# Altium PCB PDC_Rev_2.PcbDoc (part 1 of 3)
Units mil, origin at the board's own origin, x right, y up, seen from the top; angles counter-clockwise.
Board outline 5005 x 4200 mil, 4 copper layers (Top Layer, Signal_1, Signal_2, Bottom Layer), stack 23.756 mil thick; 184 components, 175 nets, 851 pads, 1149 vias.
Unrouted connection lines stored in the file: 187.
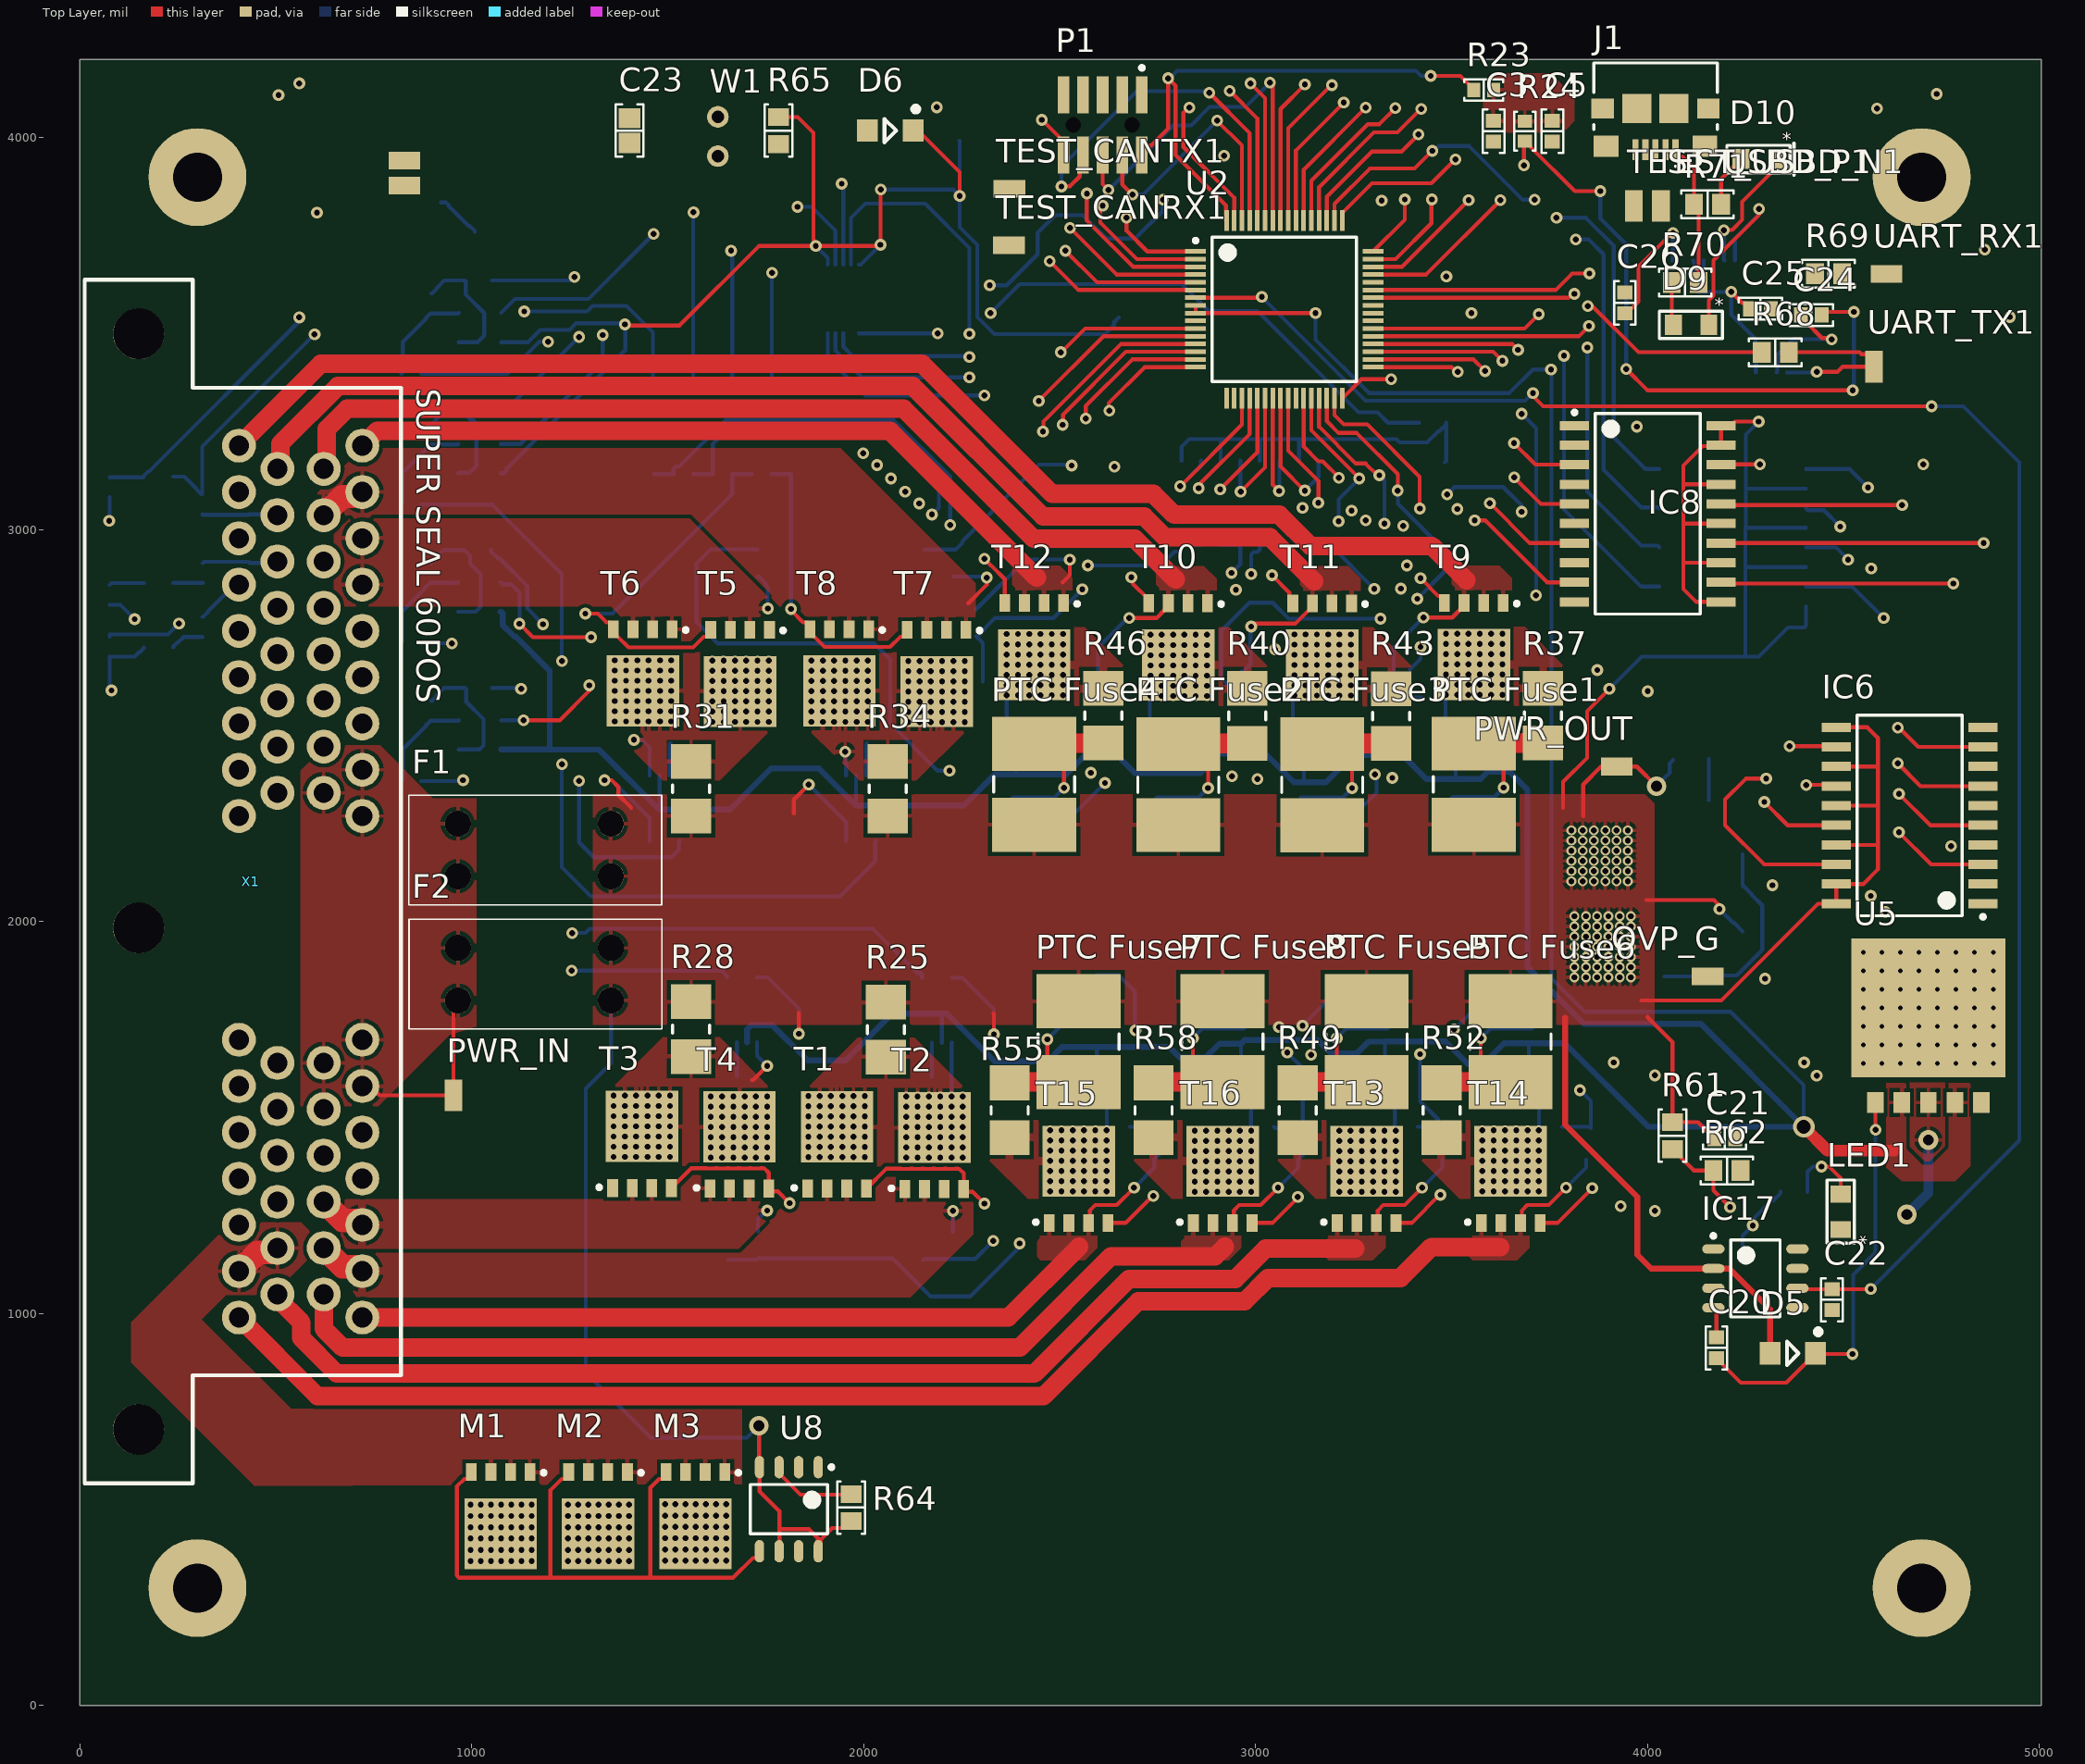
[diagram p0: Top Layer view]
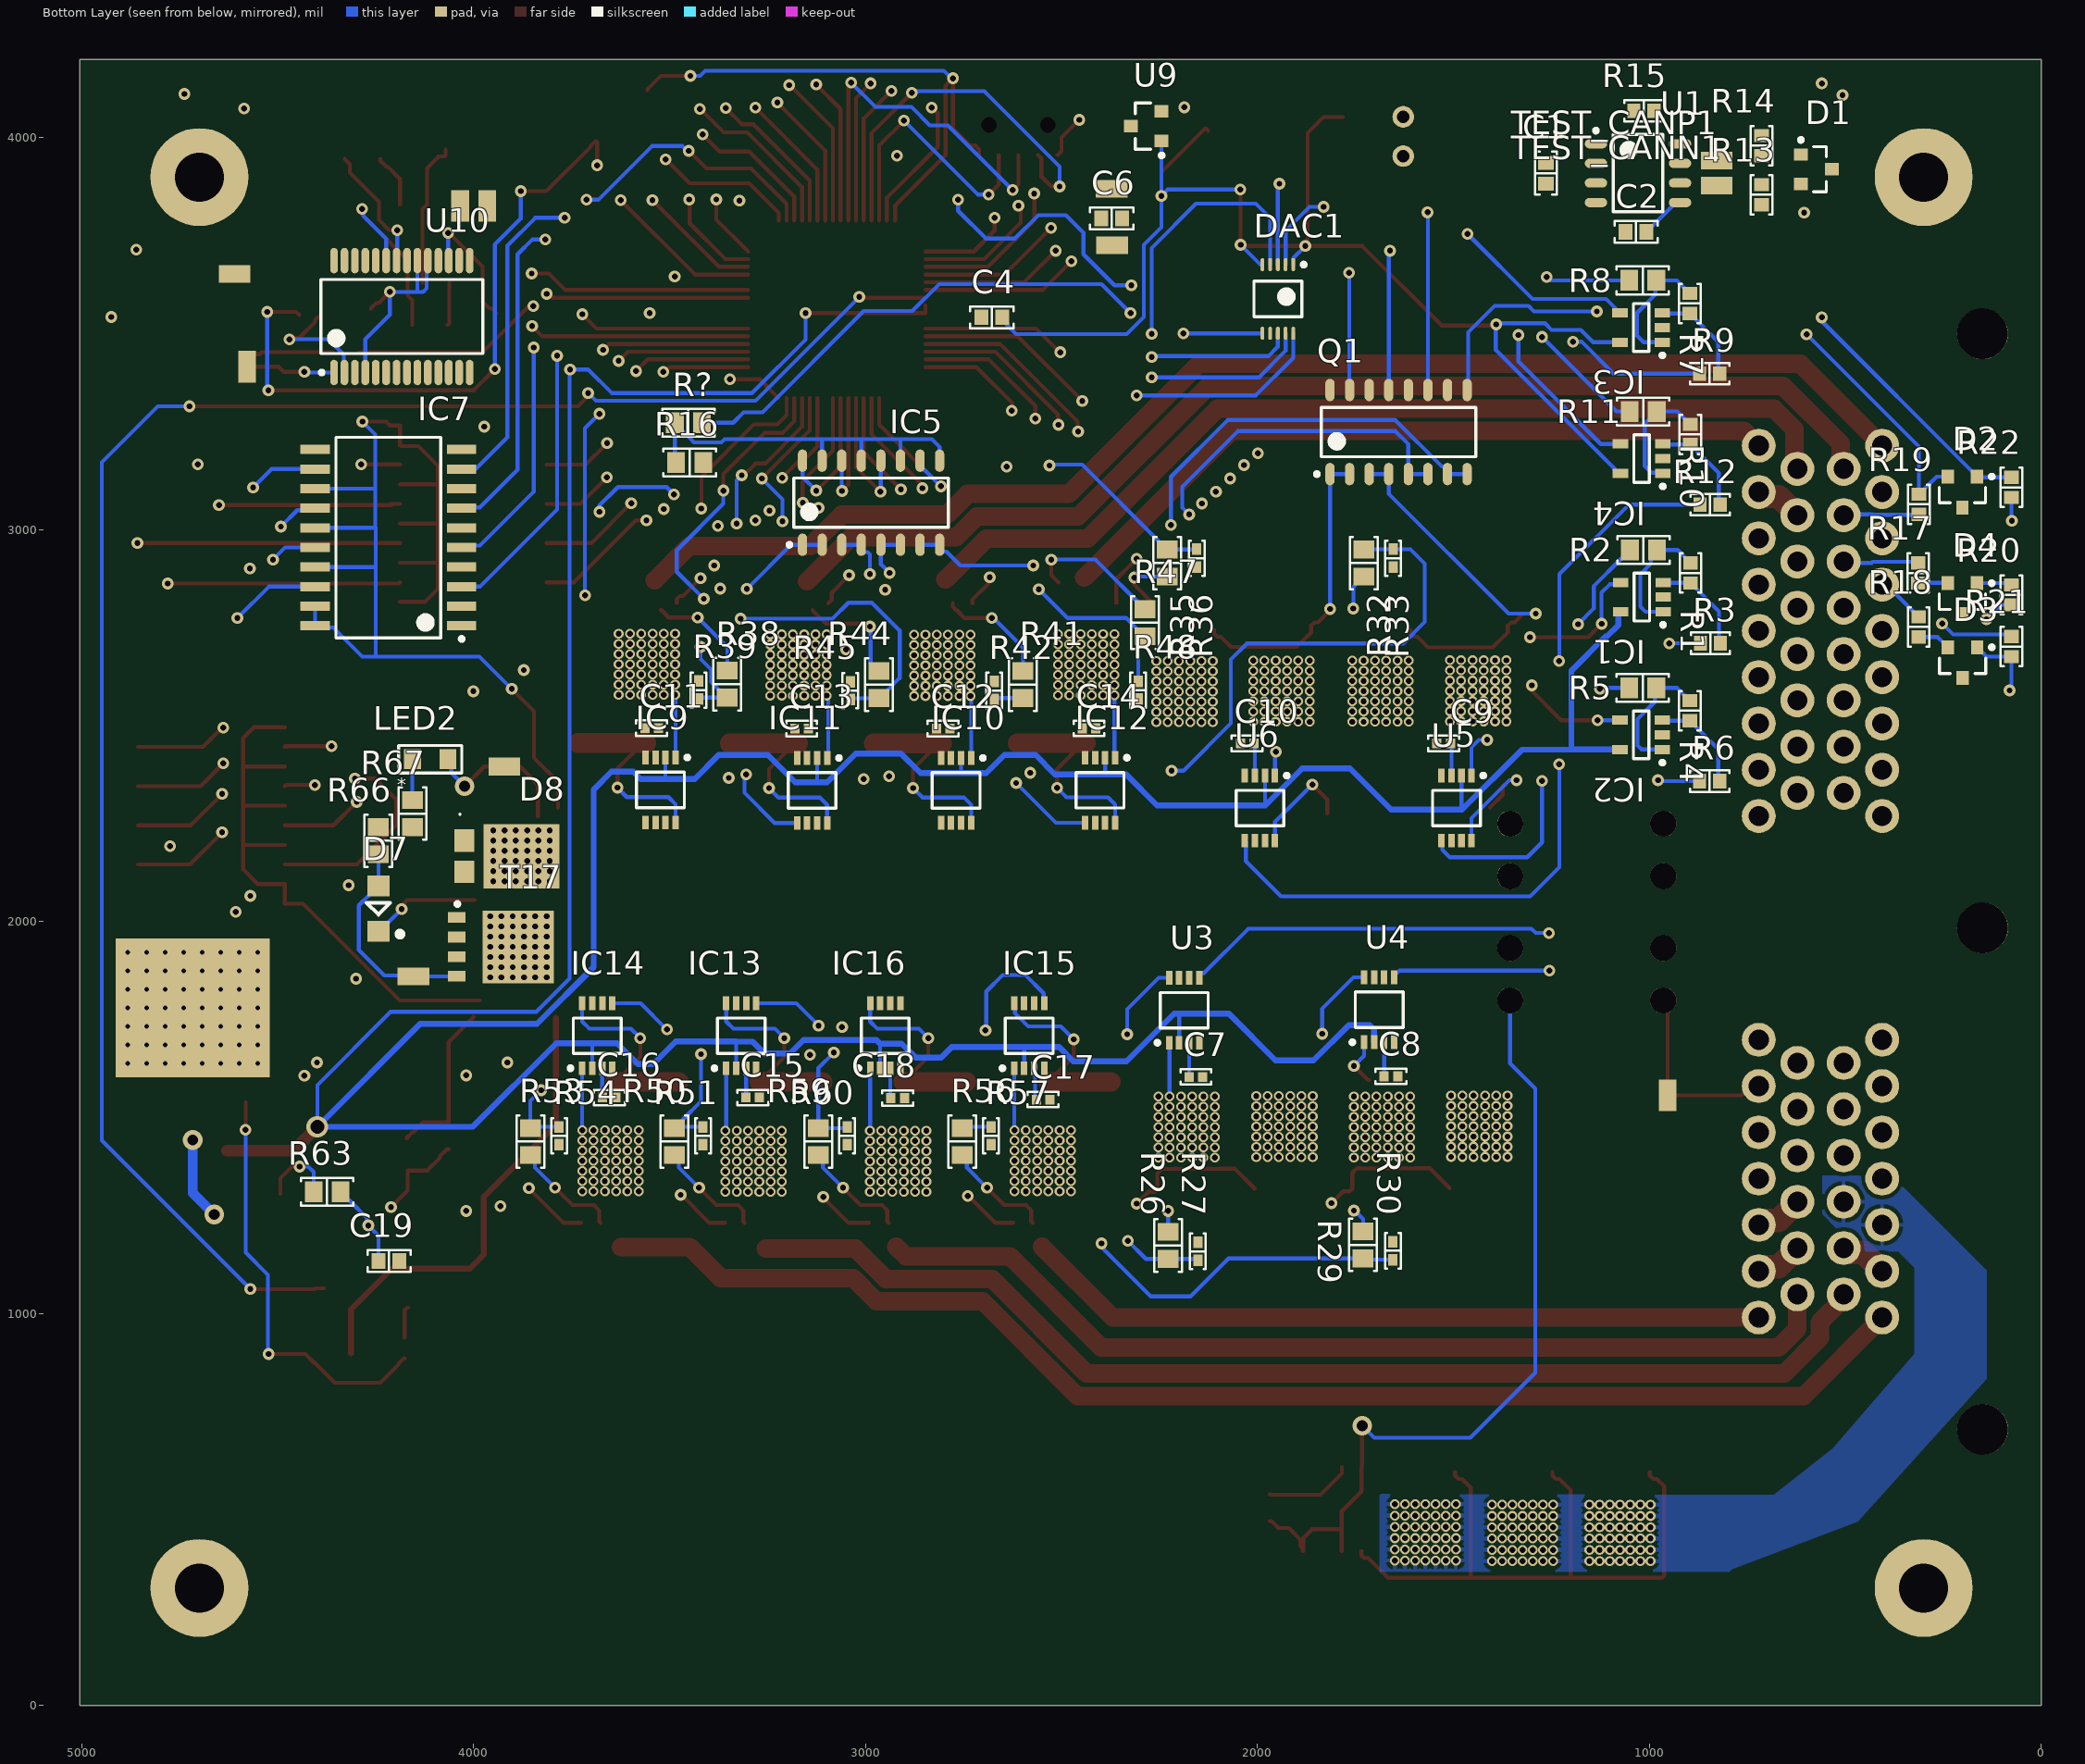
[diagram p1: Bottom Layer view, seen from below]
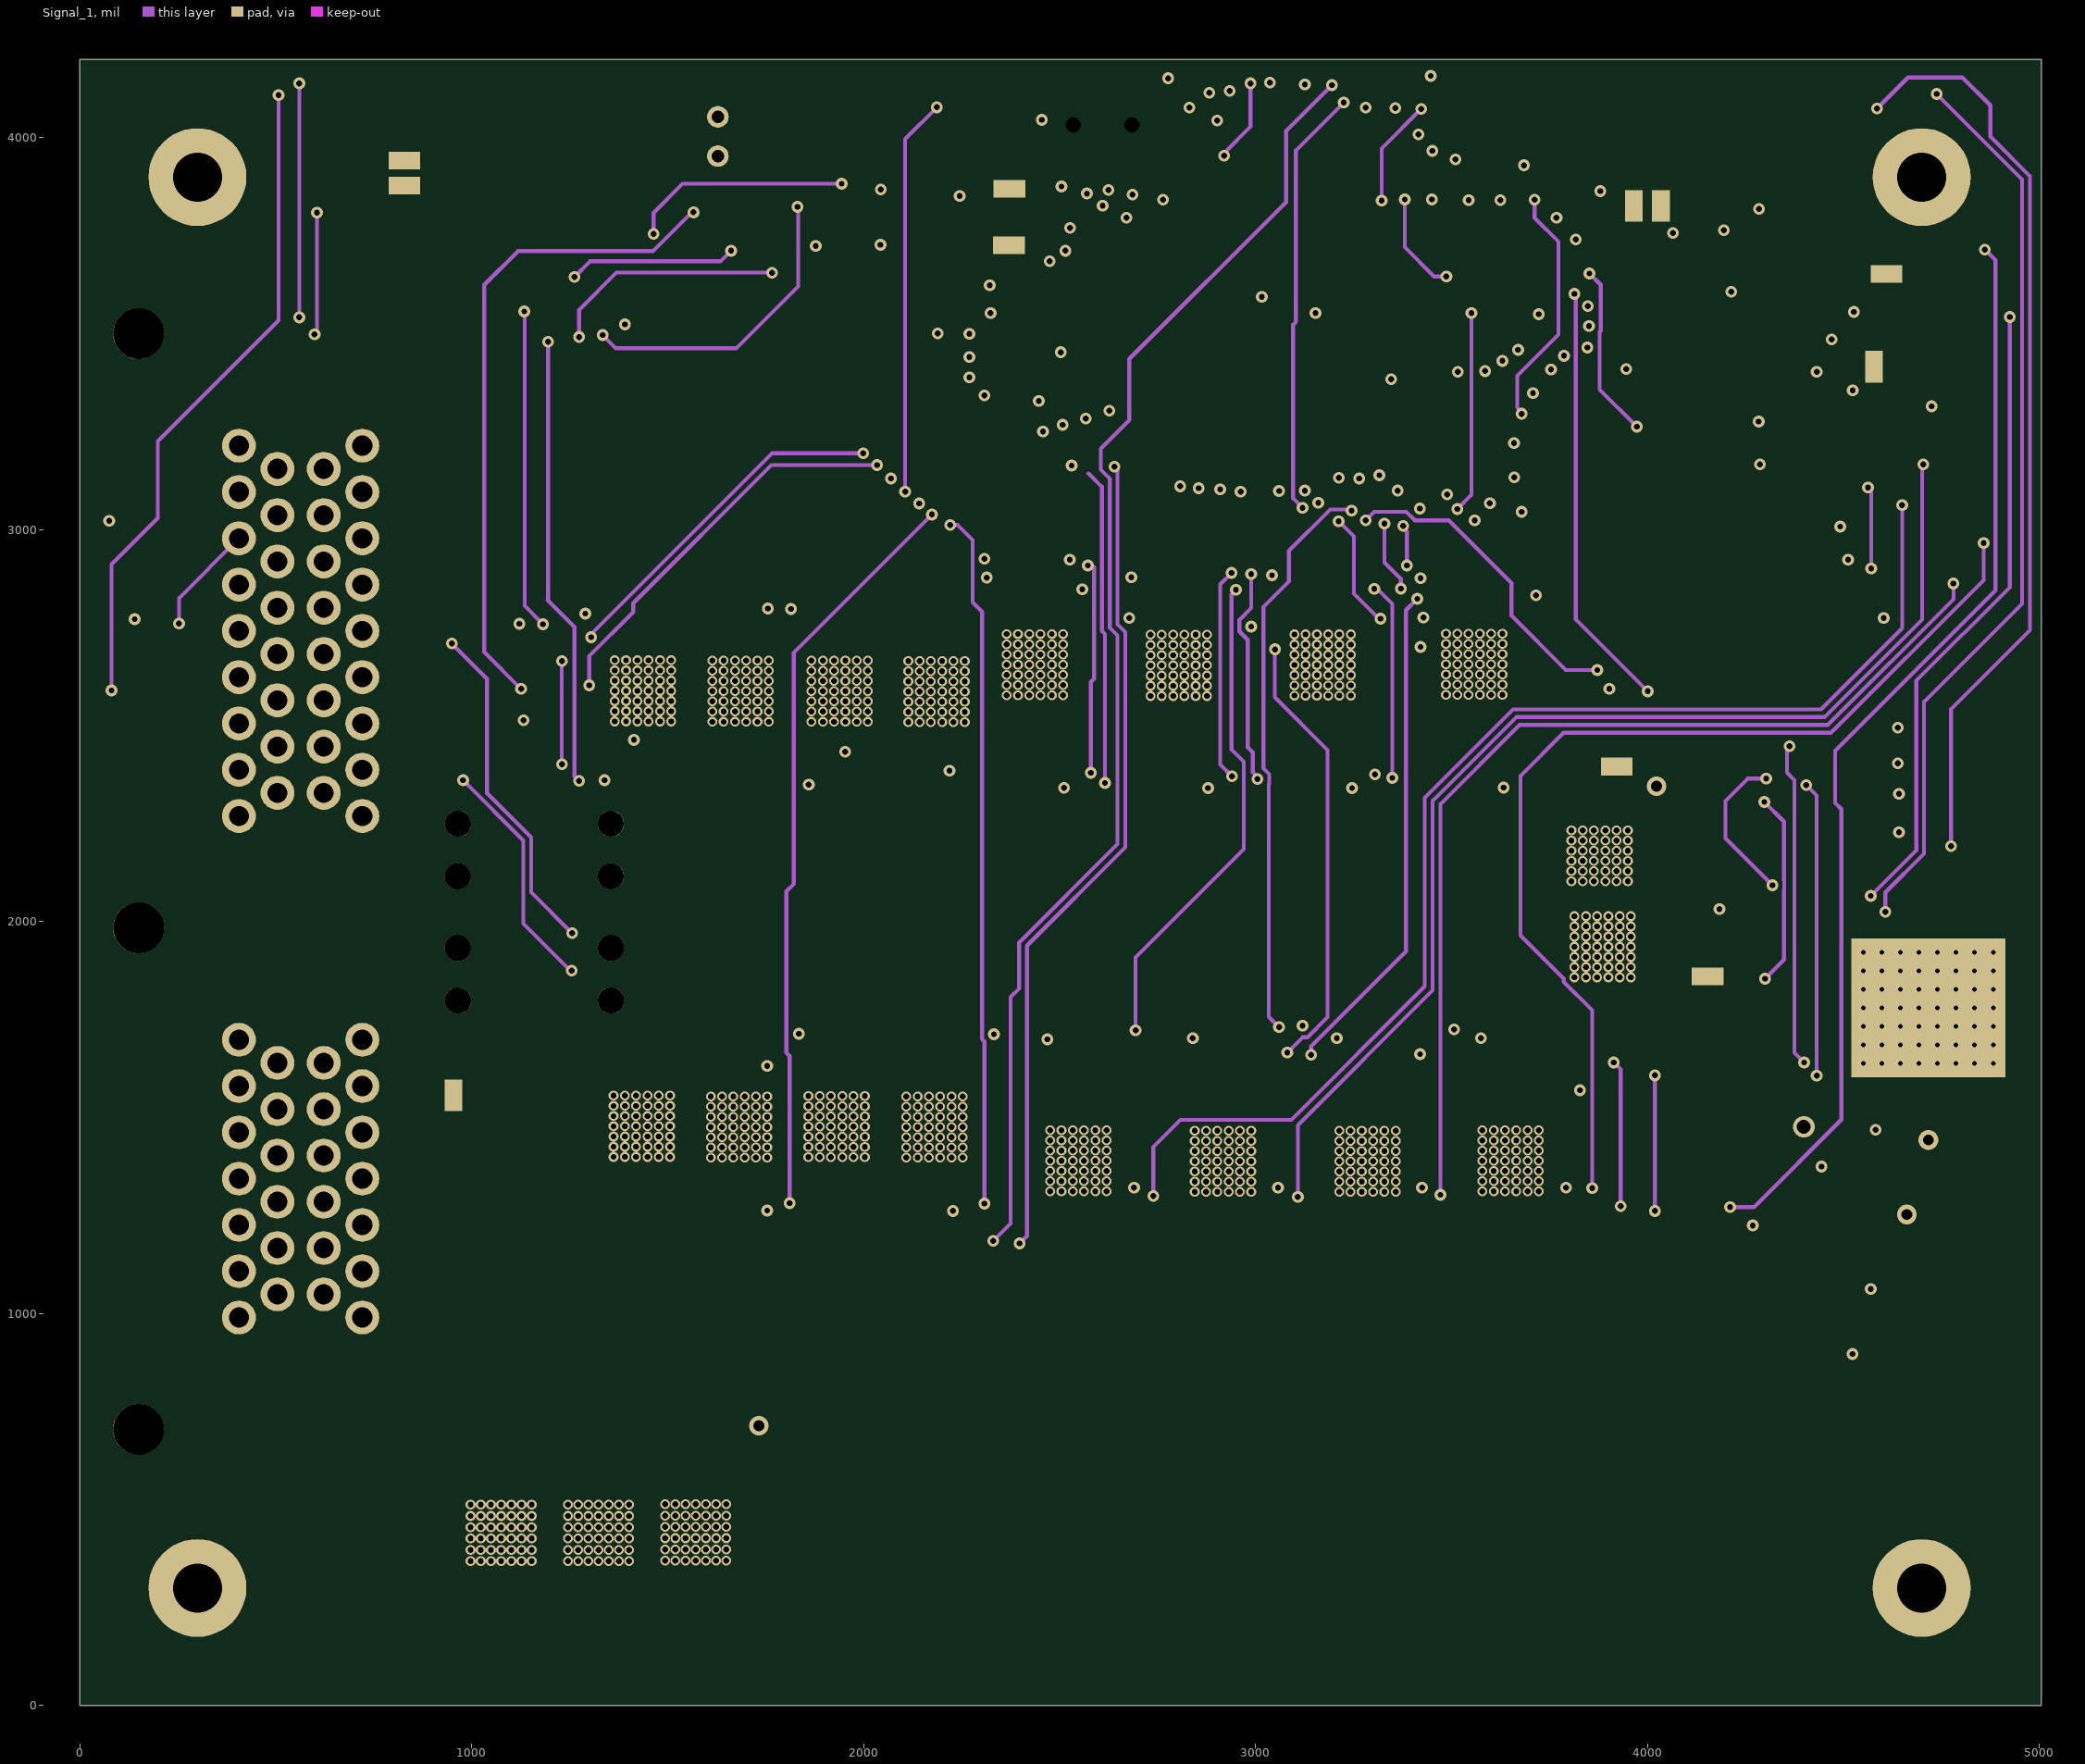
[diagram p2: Signal_1]
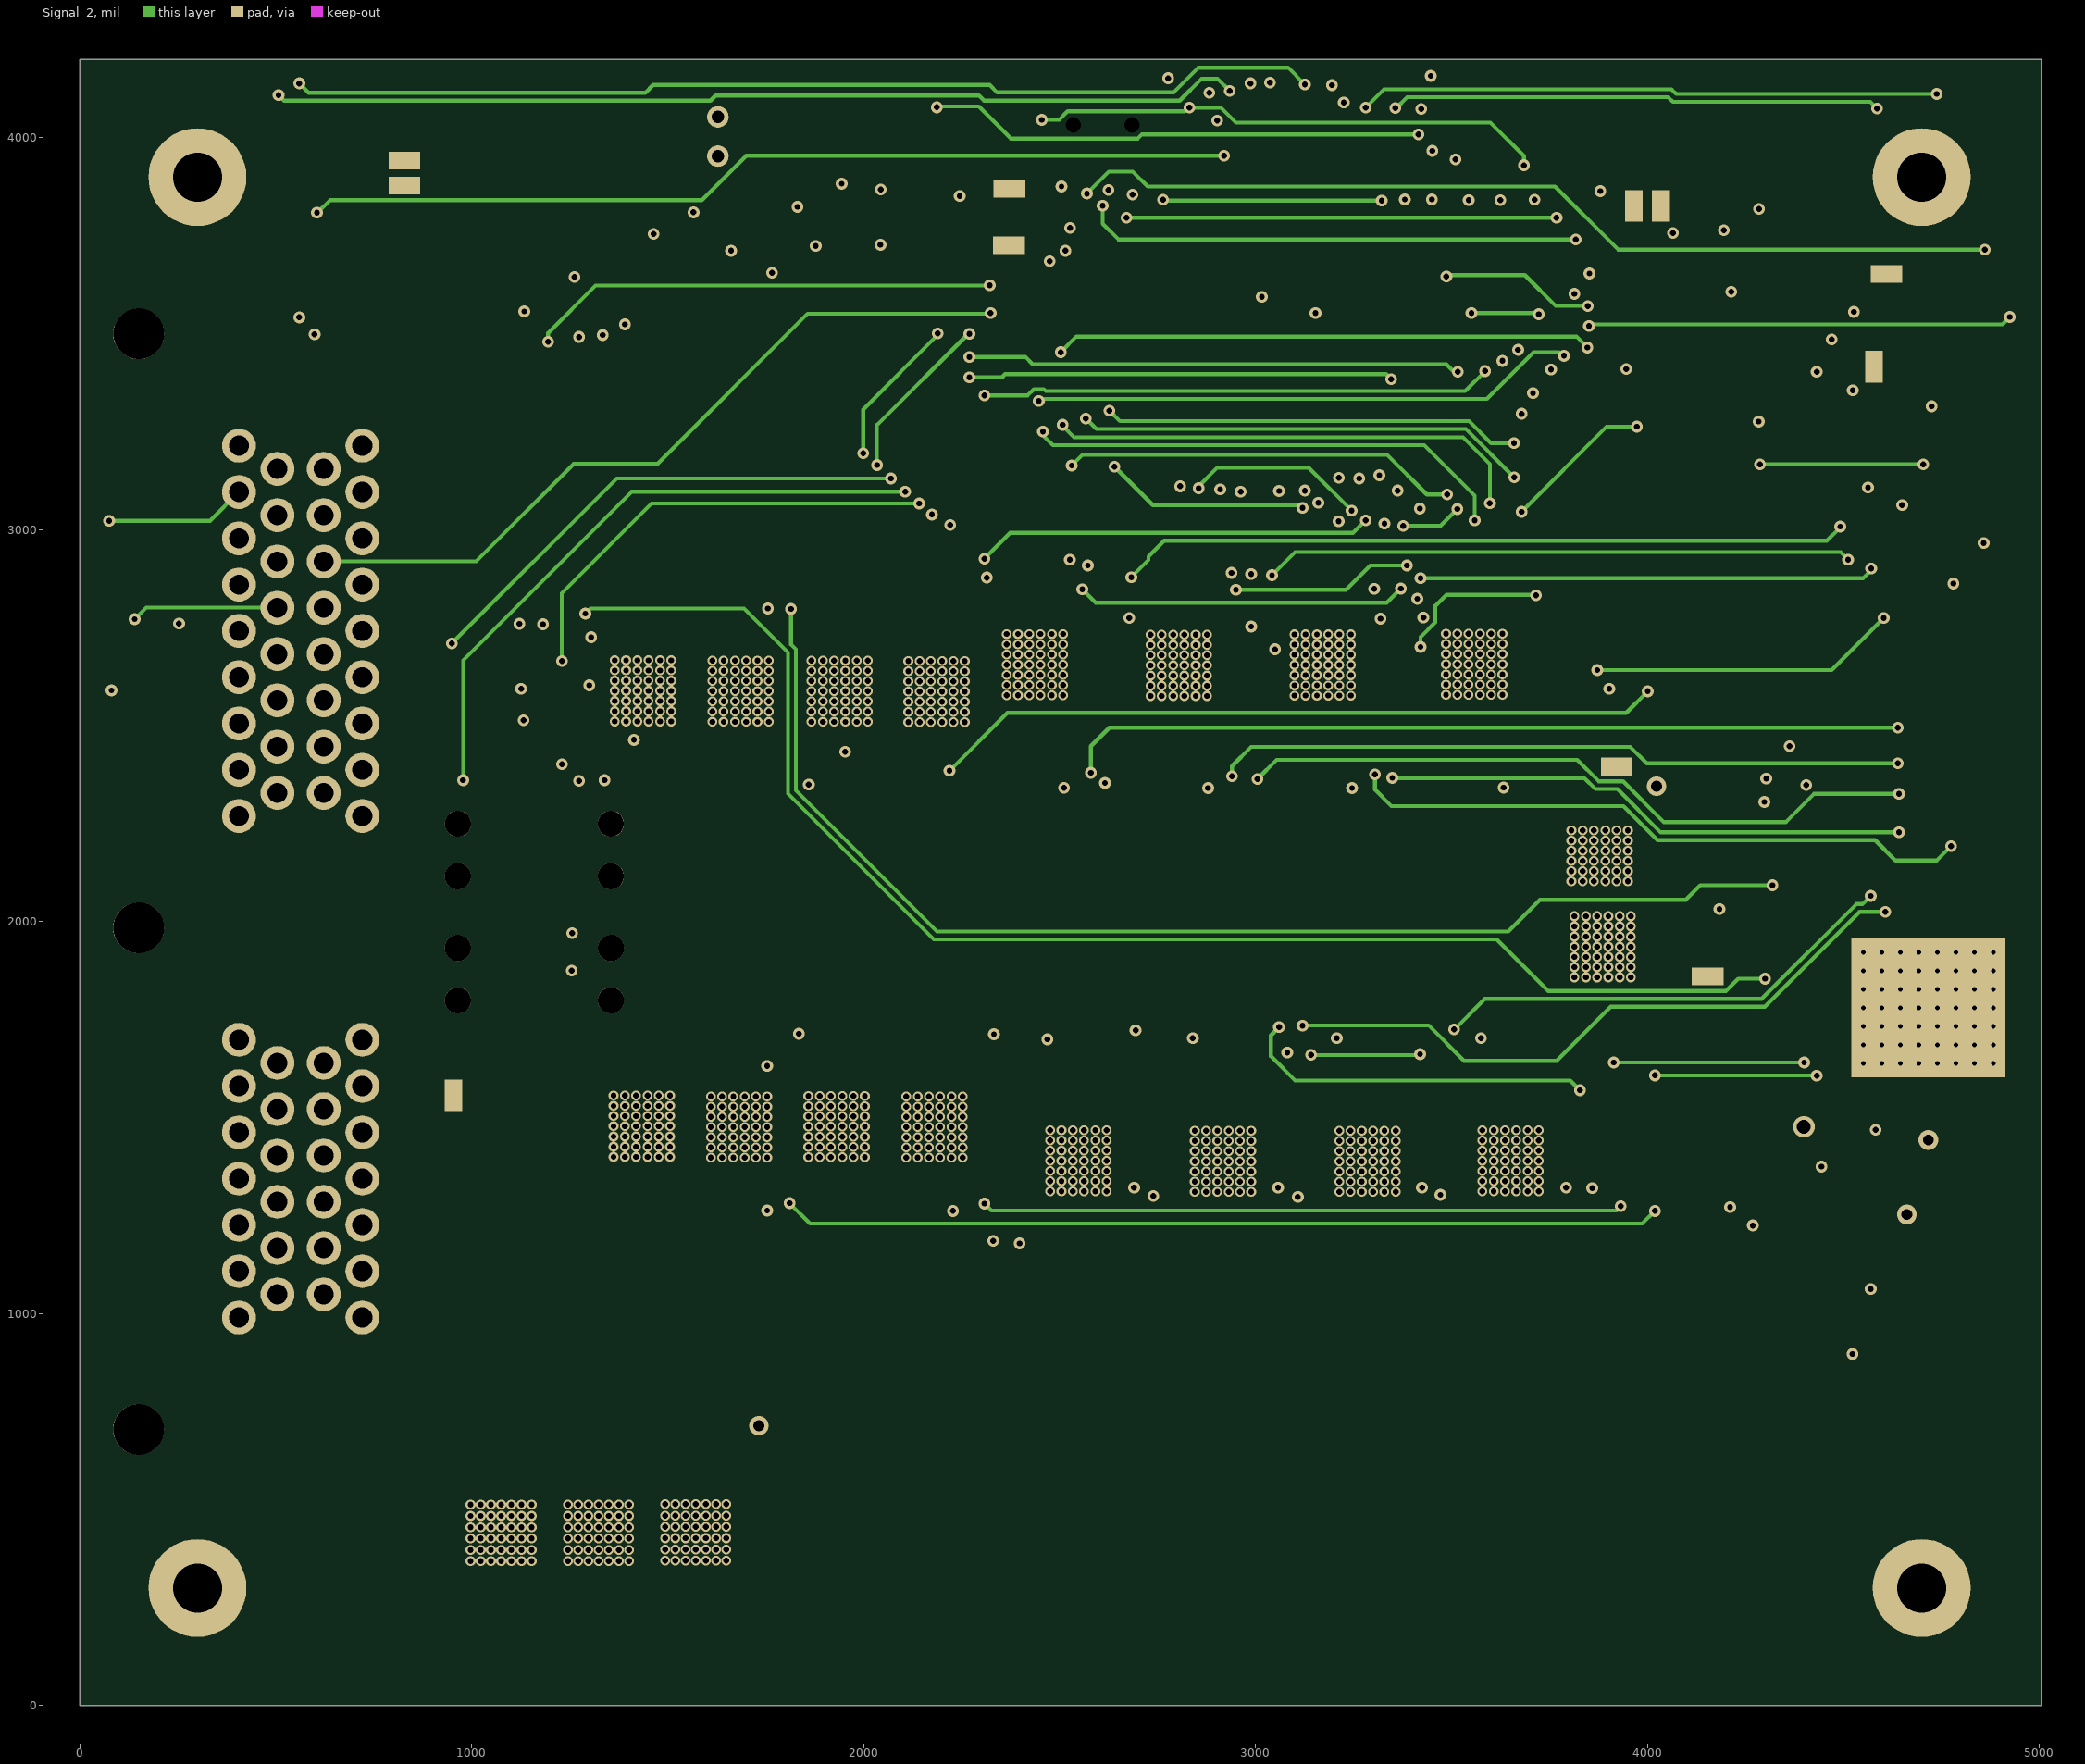
[diagram p3: Signal_2]

## Layer stack, top to bottom
Top Solder: solder mask 0.4, Solder Resist, Dk 3.5
Top Layer: signal copper 1.4
Dielectric 2: prepreg 2.8, PP-006, Dk 4.1
Signal_1: signal copper 1.3779
Dielectric 1: dielectric 12.6, FR-4, Dk 4.8
Signal_2: signal copper 1.3779
Dielectric 3: prepreg 2.8, PP-006, Dk 4.1
Bottom Layer: signal copper 1.4
Bottom Solder: solder mask 0.4, Solder Resist, Dk 3.5

## Board outline
0,0 5005,0 5005,4200 0,4200

## Design rules (kind name [scope] priority, off if disabled: settings)
Clearance Clearance_1 [All] p1: gap=10 ignorepadtopadclearanceinfootprint=FALSE except(0: Arc-Hole Track-Hole SMDPad-Hole THPad-Hole Via-Hole Fill-Hole Poly-Hole Region-Hole Text-Hole)
Clearance [All] p2: gap=10 ignorepadtopadclearanceinfootprint=FALSE except(0: Arc-Hole Track-Hole SMDPad-Hole THPad-Hole Via-Hole Fill-Hole Poly-Hole Region-Hole Text-Hole)
DiffPairsRouting [All] p1: maxlimit=10 minlimit=10 mostfreqgap=10 toplayer_minwidth=15 toplayer_maxwidth=15 toplayer_prefwidth=15 midlayer1_minwidth=15 midlayer1_maxwidth=15 midlayer1_prefwidth=15 midlayer2_minwidth=15 midlayer2_maxwidth=15 midlayer2_prefwidth=15 bottomlayer_minwidth=15 bottomlayer_maxwidth=15 bottomlayer_prefwidth=15 maxuncoupledlength=500
MatchedLengths "Schematic Matched Net Lengths" [InNet('D_N')] p1: tolerance=10 checknetsindiffpair=FALSE checkdiffpairvsdiffpair=TRUE checkxsignals=TRUE checkothers=TRUE
PolygonConnect [All] p1: connectstyle=Relief reliefconductorwidth=10 reliefentries=4 polygonreliefangle="90 Angle" airgapwidth=10
RoutingVias [All] p1: holewidth=15 width=30 viastyle="Through Hole" minholewidth=15 minwidth=30 maxholewidth=28 maxwidth=50
SolderMaskExpansion [All] p1: expansion=4
Width [All] p1: maxlimit=10 minlimit=10 preferedwidth=10
29 further rules are at their usual default settings.

## Classes and differential pairs
channel class PDC_Low_Current_Outputs: U_PDC_Low_Current_Outputs1 U_PDC_Low_Current_Outputs2 U_PDC_Low_Current_Outputs3 U_PDC_Low_Current_Outputs4 U_PDC_Low_Current_Outputs5 U_PDC_Low_Current_Outputs6 U_PDC_Low_Current_Outputs7 U_PDC_Low_Current_Outputs8
channel class PDC_high_Current_Outputs: U_PDC_high_Current_Outputs1 U_PDC_high_Current_Outputs2 U_PDC_high_Current_Outputs3 U_PDC_high_Current_Outputs4
channel class PDC_Gate_Driver: U_PDC_Gate_Driver1 U_PDC_Gate_Driver2
channel class Analog_HC_Overcurrent_Redundancy: U_Analog_HC_Overcurrent_Redundancy1 U_Analog_HC_Overcurrent_Redundancy2 U_Analog_HC_Overcurrent_Redundancy3 U_Analog_HC_Overcurrent_Redundancy4
component class U_USB: C24 C25 C26 D9 D10 J1 R68 R69 R70 R71 TEST_USBD_N1 TEST_USBD_P1 U10 UART_RX1 UART_TX1
component class U_Temperature_Sensing: U9
component class U_Superseal: X1
component class U_RVP_OVP_HC: D7 D8 LED2 OVP_G PWR_IN PWR_OUT R66 R67 T17
component class U_Reset_Pin: C23 D6 R65 W1
component class U_Rectifier_shutdown_LT1910: R64 U8
component class U_Rectifier_shutdown_Gate: M1 M2 M3
component class U_Power_supply: C19 C20 C21 C22 D5 IC17 LED1 R61 R62 R63 U5
component class U_PDC_Low_Current_Outputs8: C18 IC16 "PTC Fuse8" R58 R59 R60 T16
component class U_PDC_Low_Current_Outputs7: C17 IC15 "PTC Fuse7" R55 R56 R57 T15
component class U_PDC_Low_Current_Outputs6: C16 IC14 "PTC Fuse6" R52 R53 R54 T14
component class U_PDC_Low_Current_Outputs5: C15 IC13 "PTC Fuse5" R49 R50 R51 T13
component class U_PDC_Low_Current_Outputs4: C14 IC12 "PTC Fuse4" R46 R47 R48 T12
component class U_PDC_Low_Current_Outputs3: C13 IC11 "PTC Fuse3" R43 R44 R45 T11
component class U_PDC_Low_Current_Outputs2: C12 IC10 "PTC Fuse2" R40 R41 R42 T10
component class U_PDC_Low_Current_Outputs1: C11 IC9 "PTC Fuse1" R37 R38 R39 T9
component class U_PDC_high_Current_Outputs4: C10 R34 R35 R36 T7 T8 U6
component class U_PDC_high_Current_Outputs3: C9 R31 R32 R33 T5 T6 U5
component class U_PDC_high_Current_Outputs2: C8 R28 R29 R30 T3 T4 U4
component class U_PDC_high_Current_Outputs1: C7 R25 R26 R27 T1 T2 U3
component class U_PDC_Gate_Driver1: IC7
component class U_MCU_MKE185F512VLH16: C3 C4 C5 C6 P1 R23 R24 TEST_CANRX1 TEST_CANTX1 U2
component class U_Input_Current_Limiting: D2 D3 D4 R17 R18 R19 R20 R21 R22
component class U_Gate_driver: IC6
component class U_E_stop: IC5 R16 R?
component class U_CAN_Tranceiver: C1 C2 D1 R13 R14 R15 TEST_CANN1 TEST_CANP1 U1
component class U_Analog_HC_Overcurrent_Redundancy4: IC4 R10 R11 R12
component class U_Analog_HC_Overcurrent_Redundancy3: IC3 R7 R8 R9
component class U_Analog_HC_Overcurrent_Redundancy2: IC2 R4 R5 R6
component class U_Analog_HC_Overcurrent_Redundancy1: IC1 R1 R2 R3
component class U_Analog_HC_Overcurrent_MMPQ3904: DAC1 Q1
component class PDC: F1 F2
differential pair D: +D_P -D_N
differential pair CAN: +CAN_P -CAN_N

## Components (designator, comment, footprint, x,y, rotation, side; value= is the part's Value field where it differs from the comment)
C1 "Capacitor MLCC 0.10uf 50V CAP 0603/1608" "CAP 0603/1608" 1264,3910 r270 bottom value=0.10uf (schematic designator C11)
C2 "Capacitor MLCC 4700pf 50V CAP 0603/1608" "CAP 0603/1608" 1034,3760.23 r180 bottom value=4700pf (schematic designator C12)
C3 "Capacitor MLCC 0.10uf 16V CAP 0603/1608" "CAP 0603/1608" 3607.36,4016.98 r90 top value=0.10uf (schematic designator C6)
C4 "Capacitor MLCC 0.10uf 25V CAP 0603/1608" "CAP 0603/1608" 2678,3542 r180 bottom value=0.10uf (schematic designator C24)
C5 "Capacitor MLCC 100pf 25V CAP 0603/1608" "CAP 0603/1608" 3757.36,4016.98 r90 top value=100pf (schematic designator C23)
C6 "Capacitor MLCC 0.10uf 25V CAP 0603/1608" "CAP 0603/1608" 2371.98,3794.64 r0 bottom value=0.10uf (schematic designator C5)
C7 "Capacitor MLCC 220pf 16V CAP 0402/1005" "CAP 0402/1005" 2157,1604 r0 bottom value=220pf (schematic designator C1)
C8 "Capacitor MLCC 220pf 16V CAP 0402/1005" "CAP 0402/1005" 1659.52,1605.3 r0 bottom value=220pf (schematic designator C1)
C9 "Capacitor MLCC 220pf 16V CAP 0402/1005" "CAP 0402/1005" 1525,2455 r180 bottom value=220pf (schematic designator C1)
C10 "Capacitor MLCC 220pf 16V CAP 0402/1005" "CAP 0402/1005" 2026.44,2455 r180 bottom value=220pf (schematic designator C1)
C11 "Capacitor MLCC 220pf 16V CAP 0402/1005" "CAP 0402/1005" 3546,2493.75 r180 bottom value=220pf (schematic designator C2)
C12 "Capacitor MLCC 220pf 16V CAP 0402/1005" "CAP 0402/1005" 2802,2492.65 r180 bottom value=220pf (schematic designator C2)
C13 "Capacitor MLCC 220pf 16V CAP 0402/1005" "CAP 0402/1005" 3163,2492.54 r180 bottom value=220pf (schematic designator C2)
C14 "Capacitor MLCC 220pf 16V CAP 0402/1005" "CAP 0402/1005" 2430,2493.12 r180 bottom value=220pf (schematic designator C2)
C15 "Capacitor MLCC 220pf 16V CAP 0402/1005" "CAP 0402/1005" 3288,1551.35 r0 bottom value=220pf (schematic designator C2)
C16 "Capacitor MLCC 220pf 16V CAP 0402/1005" "CAP 0402/1005" 3654,1551.35 r0 bottom value=220pf (schematic designator C2)
C17 "Capacitor MLCC 220pf 16V CAP 0402/1005" "CAP 0402/1005" 2547,1546 r0 bottom value=220pf (schematic designator C2)
C18 "Capacitor MLCC 220pf 16V CAP 0402/1005" "CAP 0402/1005" 2918,1550 r0 bottom value=220pf (schematic designator C2)
C19 "Capacitor MLCC 10uf 16V CAP 0603/1608" "CAP 0603/1608" 4216,1134.36 r0 bottom value=10uf (schematic designator C3)
C20 "Capacitor MLCC 10uf 16V CAP 0603/1608" "CAP 0603/1608" 4176,912.57 r270 top value=10uf (schematic designator C4)
C21 "Capacitor MLCC 2.2uf 16V CAP 0603/1608" "CAP 0603/1608" 4197,1447 r180 top value=2.2uf (schematic designator C5)
C22 "Capacitor MLCC 2.2uf 16V CAP 0603/1608" "CAP 0603/1608" 4471,1035.46 r90 top value=2.2uf (schematic designator C6)
C23 "Capacitor MLCC 4700pf 25V CAP 0805/2012" "CAP 0805/2012" 1403,4018.45 r90 top value=4700pf (schematic designator C13)
C24 "Capacitor MLCC 0.10uf 25V CAP 0603/1608" "CAP 0603/1608" 4418.43,3548 r0 top value=0.10uf (schematic designator C17)
C25 "Capacitor MLCC 0.10uf 25V CAP 0603/1608" "CAP 0603/1608" 4288.43,3564 r180 top value=0.10uf (schematic designator C18)
C26 "Capacitor MLCC 0.10uf 25V CAP 0603/1608" "CAP 0603/1608" 3942.43,3579 r270 top value=0.10uf (schematic designator C19)
D1 "NUP1105LT1G" "SOT-23 (TO-236)" 574,3920 r180 bottom value=TVS_24V (schematic designator D3)
D2 "AZ23C4V7-7-F Dual Zenner Diodes" SOT23-3 201.17,3096.41 r270 bottom value=4.7V (schematic designator D3)
D3 "AZ23C4V7-7-F Dual Zenner Diodes" SOT23-3 201,2660.82 r270 bottom value=4.7V (schematic designator D4)
D4 "AZ23C4V7-7-F Dual Zenner Diodes" SOT23-3 201.17,2824.37 r270 bottom value=4.7V (schematic designator D5)
D5 "DIODE" SOD123F 4371,898.6 r0 top value=1A (schematic designator D1)
D6 "DIODE" SOD123F 2068,4018.45 r0 top
D7 "DDZ9701-7" SOD123F 4243.18,2033.33 r270 bottom value=14Vz
D8 "DIODE_2A1K" TO-277 3914,2167 r180 bottom value="20 A"
D9 "" 0805_LED 4111.43,3523 r0 top value=Green (schematic designator D4)
D10 "" 0805_LED 4283.95,3946 r0 top value=Red (schematic designator D5)
DAC1 "LED" "MSOP10 (RM-10)" 1948,3589 r270 bottom value=10bit
F1 "Fuse" 3568-MiniFuseHolder 1159.72,2183.07 r180 top
F2 "Fuse" 3568-MiniFuseHolder 1160,1866.09 r180 top
IC1 "Op-Amp LT1716" SOT23-5 1019.13,2828.4 r0 bottom
IC2 "Op-Amp LT1716" SOT23-5 1021,2476.6 r0 bottom (schematic designator IC1)
IC3 "Op-Amp LT1716" SOT23-5 1021,3516 r0 bottom (schematic designator IC1)
IC4 "Op-Amp LT1716" SOT23-5 1019.87,3181.6 r0 bottom (schematic designator IC1)
IC5 "MMPQ3906 PNP General Purpose Amp" SOIC-16-NB 2986,3069 r90 bottom (schematic designator IC2)
IC6 "LT1161ISWPBF MOSFET Driver" SO-20 4669,2271 r180 top (schematic designator IC3)
IC7 "LT1161ISWPBF MOSFET Driver" SO-20 4217.57,2980 r0 bottom (schematic designator IC4)
IC8 "LT1161ISWPBF MOSFET Driver" SO-20 4001,3041 r0 top (schematic designator IC4)
IC9 "LT6100HMS8PBF Current Sense Amp" MSOP-8 3523.39,2336.11 r270 bottom (schematic designator IC5)
IC10 "LT6100HMS8PBF Current Sense Amp" MSOP-8 2769,2335 r270 bottom (schematic designator IC5)
IC11 "LT6100HMS8PBF Current Sense Amp" MSOP-8 3136.42,2334.89 r270 bottom (schematic designator IC5)
IC12 "LT6100HMS8PBF Current Sense Amp" MSOP-8 2401.58,2335.47 r270 bottom (schematic designator IC5)
IC13 "LT6100HMS8PBF Current Sense Amp" MSOP-8 3317.33,1709 r90 bottom (schematic designator IC5)
IC14 "LT6100HMS8PBF Current Sense Amp" MSOP-8 3684.76,1709 r90 bottom (schematic designator IC5)
IC15 "LT6100HMS8PBF Current Sense Amp" MSOP-8 2582.49,1709 r90 bottom (schematic designator IC5)
IC16 "LT6100HMS8PBF Current Sense Amp" MSOP-8 2949.91,1709 r90 bottom (schematic designator IC5)
IC17 "MAX6350CSA+ 5V" SOIC-8 4275.45,1089.91 r0 top value=5V (schematic designator IC6)
J1 "1981568-1" TECO-1981568-5_V 4020.67,3969.69 r180 top value=CONN
LED1 "LED" 0805_LED 4493,1260 r270 top value=Green
LED2 "LED" 0805_LED 4111.18,2414.69 r0 bottom value=Green
M1 "PSMN2R2-25YLC 25V Logic Level MOSFET" LFPAK-SO8 1074,489.7 r270 top value=N_Channel
M2 "PSMN2R2-25YLC 25V Logic Level MOSFET" LFPAK-SO8 1322.4,489.7 r270 top value=N_Channel
M3 "PSMN2R2-25YLC 25V Logic Level MOSFET" LFPAK-SO8 1570.79,489.7 r270 top value=N_Channel
OVP_G "RCU-0C" RCU-0C 4153.62,1860.73 r90 top
P1 "5103309-1" HDR2X5_SMT 2610,4033 r180 top value=CONN
"PTC Fuse1" "PTC Fuse" "PTC Fuse 2920/07351" 3557.27,2350.87 r270 top
"PTC Fuse2" "PTC Fuse" "PTC Fuse 2920/07351" 2802.89,2349.76 r270 top (schematic designator "PTC Fuse1")
"PTC Fuse3" "PTC Fuse" "PTC Fuse 2920/07351" 3170.31,2349.66 r270 top (schematic designator "PTC Fuse1")
"PTC Fuse4" "PTC Fuse" "PTC Fuse 2920/07351" 2435.47,2350.23 r270 top (schematic designator "PTC Fuse1")
"PTC Fuse5" "PTC Fuse" "PTC Fuse 2920/07351" 3283.45,1694.24 r90 top (schematic designator "PTC Fuse1")
"PTC Fuse6" "PTC Fuse" "PTC Fuse 2920/07351" 3650.87,1694.24 r90 top (schematic designator "PTC Fuse1")
"PTC Fuse7" "PTC Fuse" "PTC Fuse 2920/07351" 2548.6,1694.24 r90 top (schematic designator "PTC Fuse1")
"PTC Fuse8" "PTC Fuse" "PTC Fuse 2920/07351" 2916.02,1694.24 r90 top (schematic designator "PTC Fuse1")
PWR_IN "RCU-0C" RCU-0C 953.1,1557 r180 top
PWR_OUT "RCU-0C" RCU-0C 3922,2396 r90 top
Q1 "MMPQ3904" SOIC-16-NB 1640,3249.35 r90 bottom
R1 "Resistor 10k 0603 1/10W 1%" "RES 0603/1608" 894.95,2890 r90 bottom value=10k
R2 "Resistor 10k 0805 1/10W 1%" "RES 0805/2012" 1015,2948.65 r0 bottom value=10k
R3 "Resistor 3.0k 0603 1/10W 1%" "RES 0603/1608" 844.13,2710.8 r180 bottom value=3.0k
R4 "Resistor 10k 0603 1/10W 1%" "RES 0603/1608" 896.82,2538.2 r90 bottom value=10k (schematic designator R1)
R5 "Resistor 10k 0805 1/10W 1%" "RES 0805/2012" 1016.87,2596.84 r0 bottom value=10k (schematic designator R2)
R6 "Resistor 3.0k 0603 1/10W 1%" "RES 0603/1608" 846,2359 r180 bottom value=3.0k (schematic designator R3)
R7 "Resistor 10k 0603 1/10W 1%" "RES 0603/1608" 896.82,3577.6 r90 bottom value=10k (schematic designator R1)
R8 "Resistor 10k 0805 1/10W 1%" "RES 0805/2012" 1016.87,3636.25 r0 bottom value=10k (schematic designator R2)
R9 "Resistor 3.0k 0603 1/10W 1%" "RES 0603/1608" 846,3398.4 r180 bottom value=3.0k (schematic designator R3)
R10 "Resistor 10k 0603 1/10W 1%" "RES 0603/1608" 895.68,3243.2 r90 bottom value=10k (schematic designator R1)
R11 "Resistor 10k 0805 1/10W 1%" "RES 0805/2012" 1015.73,3301.84 r0 bottom value=10k (schematic designator R2)
R12 "Resistor 3.0k 0603 1/10W 1%" "RES 0603/1608" 844.87,3064 r180 bottom value=3.0k (schematic designator R3)
R13 "Resistor 62 0603 1/10W 5%" "RES 0603/1608" 714,3855 r270 bottom value=62 (schematic designator R16)
R14 "Resistor 62 0603 1/10W 5%" "RES 0603/1608" 714,3980 r270 bottom value=62 (schematic designator R17)
R15 "Resistor 100 0603 1/10W 10%" "RES 0603/1608" 1014,4068.83 r180 bottom value=100 (schematic designator R18)
R16 "Resistor 10k 0805 1/10W 1%" "RES 0805/2012" 3448.84,3172 r180 bottom value=10k (schematic designator R4)
R17 "Resistor 2.2k 0603 1/10W 1%" "RES 0603/1608" 314,2890 r90 bottom value=2.2k (schematic designator R18)
R18 "Resistor 2.2k 0603 1/10W 1%" "RES 0603/1608" 313,2752 r90 bottom value=2.2k (schematic designator R19)
R19 "Resistor 2.2k 0603 1/10W 1%" "RES 0603/1608" 312,3065 r270 bottom value=2.2k (schematic designator R20)
R20 "Resistor 2.2k 0603 1/10W 1%" "RES 0603/1608" 76,2834 r270 bottom value=2.2k (schematic designator R21)
R21 "Resistor 2.2k 0603 1/10W 1%" "RES 0603/1608" 75.83,2702 r90 bottom value=2.2k (schematic designator R22)
R22 "Resistor 2.2k 0603 1/10W 1%" "RES 0603/1608" 76,3108.41 r270 bottom value=2.2k (schematic designator R23)
R23 "Resistor 10k 0603 1/10W 1%" "RES 0603/1608" 3582.36,4121.98 r0 top value=10k (schematic designator R4)
R24 "Resistor 10k 0603 1/10W 5%" "RES 0603/1608" 3687.36,4016.98 r90 top value=10k (schematic designator R5)
R25 "Resistor .002 2010 1.5W 1%" "RES 2010/5025" 2057,1724.68 r90 top value=.002 (schematic designator R5)
R26 "Resistor 27k 0805 1/10W 10%" "RES 0805/2012" 2227.93,1174 r90 bottom value=27k (schematic designator R6)
R27 "Resistor 10k 0402 1/10W 1%" "RES 0402/1005" 2152,1159 r270 bottom value=10k (schematic designator R7)
R28 "Resistor .002 2010 1.5W 1%" "RES 2010/5025" 1559.52,1725.98 r90 top value=.002 (schematic designator R5)
R29 "Resistor 27k 0805 1/10W 10%" "RES 0805/2012" 1730.46,1175.3 r90 bottom value=27k (schematic designator R6)
R30 "Resistor 10k 0402 1/10W 1%" "RES 0402/1005" 1654.52,1160.3 r270 bottom value=10k (schematic designator R7)
R31 "Resistor .002 2010 1.5W 1%" "RES 2010/5025" 1560,2339.32 r270 top value=.002 (schematic designator R5)
R32 "Resistor 27k 0805 1/10W 10%" "RES 0805/2012" 1729.07,2915 r270 bottom value=27k (schematic designator R6)
R33 "Resistor 10k 0402 1/10W 1%" "RES 0402/1005" 1653.71,2927.64 r90 bottom value=10k (schematic designator R7)
R34 "Resistor .002 2010 1.5W 1%" "RES 2010/5025" 2061.44,2339.32 r270 top value=.002 (schematic designator R5)
R35 "Resistor 27k 0805 1/10W 10%" "RES 0805/2012" 2230.5,2915 r270 bottom value=27k (schematic designator R6)
R36 "Resistor 10k 0402 1/10W 1%" "RES 0402/1005" 2155.15,2927.64 r90 bottom value=10k (schematic designator R7)
R37 "Resistor .02 2010 1W 1%" "RES 2010/5025" 3733.39,2526.11 r270 top value=.02 (schematic designator R8)
R38 "Resistor 27k 0805 1/10W 10%" "RES 0805/2012" 3352.68,2606.11 r90 bottom value=27k (schematic designator R9)
R39 "Resistor 10k 0402 1/10W 1%" "RES 0402/1005" 3426.06,2591.11 r270 bottom value=10k (schematic designator R10)
R40 "Resistor .02 2010 1W 1%" "RES 2010/5025" 2979,2525 r270 top value=.02 (schematic designator R8)
R41 "Resistor 27k 0805 1/10W 10%" "RES 0805/2012" 2598.29,2605 r90 bottom value=27k (schematic designator R9)
R42 "Resistor 10k 0402 1/10W 1%" "RES 0402/1005" 2671.68,2590 r270 bottom value=10k (schematic designator R10)
R43 "Resistor .02 2010 1W 1%" "RES 2010/5025" 3346.42,2524.89 r270 top value=.02 (schematic designator R8)
R44 "Resistor 27k 0805 1/10W 10%" "RES 0805/2012" 2965.71,2604.89 r90 bottom value=27k (schematic designator R9)
R45 "Resistor 10k 0402 1/10W 1%" "RES 0402/1005" 3039.1,2589.89 r270 bottom value=10k (schematic designator R10)
R46 "Resistor .02 2010 1W 1%" "RES 2010/5025" 2611.58,2525.47 r270 top value=.02 (schematic designator R8)
R47 "Resistor 27k 0805 1/10W 10%" "RES 0805/2012" 2287,2763 r90 bottom value=27k (schematic designator R9)
R48 "Resistor 10k 0402 1/10W 1%" "RES 0402/1005" 2304.26,2590.47 r90 bottom value=10k (schematic designator R10)
R49 "Resistor .02 2010 1W 1%" "RES 2010/5025" 3107.33,1519 r90 top value=.02 (schematic designator R8)
R50 "Resistor 27k 0805 1/10W 10%" "RES 0805/2012" 3488.04,1439 r270 bottom value=27k (schematic designator R9)
R51 "Resistor 10k 0402 1/10W 1%" "RES 0402/1005" 3414.66,1454 r90 bottom value=10k (schematic designator R10)
R52 "Resistor .02 2010 1W 1%" "RES 2010/5025" 3474.76,1519 r90 top value=.02 (schematic designator R8)
R53 "Resistor 27k 0805 1/10W 10%" "RES 0805/2012" 3855.46,1439 r270 bottom value=27k (schematic designator R9)
R54 "Resistor 10k 0402 1/10W 1%" "RES 0402/1005" 3782.08,1454 r90 bottom value=10k (schematic designator R10)
R55 "Resistor .02 2010 1W 1%" "RES 2010/5025" 2372.49,1519 r90 top value=.02 (schematic designator R8)
R56 "Resistor 27k 0805 1/10W 10%" "RES 0805/2012" 2753.2,1439 r270 bottom value=27k (schematic designator R9)
R57 "Resistor 10k 0402 1/10W 1%" "RES 0402/1005" 2679.81,1454 r90 bottom value=10k (schematic designator R10)
R58 "Resistor .02 2010 1W 1%" "RES 2010/5025" 2739.91,1519 r90 top value=.02 (schematic designator R8)
R59 "Resistor 27k 0805 1/10W 10%" "RES 0805/2012" 3120.62,1439 r270 bottom value=27k (schematic designator R9)
R60 "Resistor 10k 0402 1/10W 1%" "RES 0402/1005" 3047.24,1454 r90 bottom value=10k (schematic designator R10)
R61 "Resistor 39k 0805 1/10W 10%" "RES 0805/2012" 4064,1454 r90 top value=39k (schematic designator R11)
R62 "Resistor 10k 0805 1/4W 10%" "RES 0805/2012" 4203,1365.36 r180 top value=10k (schematic designator R12)
R63 "Resistor 1.0k 0805 1/10W 10%" "RES 0805/2012" 4374,1311 r0 bottom value=1.0k (schematic designator R13)
R64 "Resistance" "RES 0805/2012" 1968.34,505 r90 top value=14.7K (schematic designator R14)
R65 "Resistor 100k 0805 1/10W 1%" "RES 0805/2012" 1783,4018.45 r90 top value=100k (schematic designator R26)
R66 "Resistor 47k 0805 1/10W 1%" "RES 0805/2012" 4242.97,2206.73 r270 bottom value=47k (schematic designator R27)
R67 "Resistor 470 0805 1/10W 1%" "RES 0805/2012" 4156.18,2275.73 r90 bottom value=470 (schematic designator R28)
R68 "Resistor 1.0k 0805 1/4W 1%" "RES 0805/2012" 4326.18,3453 r180 top value=1.0k (schematic designator R21)
R69 "Resistor 1.0k 0805 1/4W 1%" "RES 0805/2012" 4462,3653 r180 top value=1.0k (schematic designator R22)
R70 "Resistor 1.0k 0805 1/4W 1%" "RES 0805/2012" 4096.43,3630.47 r0 top value=1.0k (schematic designator R23)
R71 "Resistor 1.0k 0805 1/4W 1%" "RES 0805/2012" 4153.43,3830 r180 top value=1.0k (schematic designator R24)
R? "Resistor 100k 0805 1/2W 1%" "RES 0805/2012" 3452,3273 r180 bottom value=100k
T1 "PSMN2R2-25YLC 25V Logic Level MOSFET" LFPAK-SO8 1932.08,1425.3 r90 top value=N_Channel
T2 "PSMN2R2-25YLC 25V Logic Level MOSFET" LFPAK-SO8 2180.48,1424 r90 top value=N_Channel
T3 "PSMN2R2-25YLC 25V Logic Level MOSFET" LFPAK-SO8 1434.6,1426.6 r90 top value=N_Channel (schematic designator T1)
T4 "PSMN2R2-25YLC 25V Logic Level MOSFET" LFPAK-SO8 1683,1425.3 r90 top value=N_Channel (schematic designator T2)
T5 "PSMN2R2-25YLC 25V Logic Level MOSFET" LFPAK-SO8 1684.92,2638.7 r270 top value=N_Channel (schematic designator T1)
T6 "PSMN2R2-25YLC 25V Logic Level MOSFET" LFPAK-SO8 1436.52,2640 r270 top value=N_Channel (schematic designator T2)
T7 "PSMN2R2-25YLC 25V Logic Level MOSFET" LFPAK-SO8 2186.36,2638.7 r270 top value=N_Channel (schematic designator T1)
T8 "PSMN2R2-25YLC 25V Logic Level MOSFET" LFPAK-SO8 1937.96,2640 r270 top value=N_Channel (schematic designator T2)
T9 "PSMN2R2-25YLC 25V Logic Level MOSFET" LFPAK-SO8 3557.08,2707.34 r270 top value=N_Channel (schematic designator T3)
T10 "PSMN2R2-25YLC 25V Logic Level MOSFET" LFPAK-SO8 2802.69,2706.23 r270 top value=N_Channel (schematic designator T3)
T11 "PSMN2R2-25YLC 25V Logic Level MOSFET" LFPAK-SO8 3170.11,2706.12 r270 top value=N_Channel (schematic designator T3)
T12 "PSMN2R2-25YLC 25V Logic Level MOSFET" LFPAK-SO8 2435.27,2706.7 r270 top value=N_Channel (schematic designator T3)
T13 "PSMN2R2-25YLC 25V Logic Level MOSFET" LFPAK-SO8 3283.64,1337.77 r90 top value=N_Channel (schematic designator T3)
T14 "PSMN2R2-25YLC 25V Logic Level MOSFET" LFPAK-SO8 3651.06,1337.77 r90 top value=N_Channel (schematic designator T3)
T15 "PSMN2R2-25YLC 25V Logic Level MOSFET" LFPAK-SO8 2548.8,1337.77 r90 top value=N_Channel (schematic designator T3)
T16 "PSMN2R2-25YLC 25V Logic Level MOSFET" LFPAK-SO8 2916.22,1337.77 r90 top value=N_Channel (schematic designator T3)
T17 "PSMN2R2-25YLC 25V Logic Level MOSFET" LFPAK-SO8 3937.28,1935.73 r180 bottom value=N_Channel (schematic designator T4)
TEST_CANN1 "RCU-0C" RCU-0C 827.98,3878.54 r90 bottom
TEST_CANP1 "RCU-0C" RCU-0C 827.98,3941.83 r90 bottom
TEST_CANRX1 "RCU-0C" RCU-0C 2371,3726 r90 top
TEST_CANTX1 "RCU-0C" RCU-0C 2371.98,3869.64 r90 top
TEST_USBD_N1 "RCU-0C" RCU-0C 4034.43,3826 r180 top
TEST_USBD_P1 "RCU-0C" RCU-0C 3965.43,3826 r0 top
U1 "MCP2561 CAN Transceiver" SOIC-8 1029,3910 r180 bottom value=CAN/UART (schematic designator U4)
U2 "" TQFP64 3073.62,3562.64 r0 top
U3 "LT6100HMS8PBF Current Sense Amp" MSOP-8 2187,1774 r90 bottom (schematic designator U1)
U4 "LT6100HMS8PBF Current Sense Amp" MSOP-8 1689.52,1775.3 r90 bottom (schematic designator U1)
U5 "LT6100HMS8PBF Current Sense Amp" MSOP-8 1492.2,2290 r270 bottom (schematic designator U1)
U5 "BA50DD0WHFP-TR Linear Voltage Regulators 5" HRP5 4716.89,1780 r0 top value=5V
U6 "LT6100HMS8PBF Current Sense Amp" MSOP-8 1993.64,2290 r270 bottom (schematic designator U1)
U8 "LT1910" SOIC-8 1809.34,501 r270 top (schematic designator U3)
U9 "MCP970x" SOT23-3 2284,4030 r0 bottom (schematic designator U6)
U10 "FT232RL" SSOP-28 4183.43,3544 r90 bottom (schematic designator U6)
UART_RX1 "RCU-0C" RCU-0C 4610,3653 r90 top
UART_TX1 "RCU-0C" RCU-0C 4578,3416 r180 top
W1 "Jumper" XG8T-0231 1628,3953.45 r90 top
X1 "3-6437285-2" "SUPERSEAL 60POS 90Deg" 150,3500 r270 top value=CONN

## Footprints (in the part's own frame and the unit in brackets; to place one, negate y for a bottom-side part, rotate by r counter-clockwise, add the part's x,y. Pads: shape width x height; smd on the part's side, far side on the other; paste and mask are expansions set on the pad)
0805_LED [mm]
  rect 1.1x1.3 smd: 1(-1.15,0) 2(1.15,0)
  silkscreen extent -2.06,-0.89 2.03,0.89, body extent -1.05,-0.67 1.05,0.68, height 0.9
3568-MiniFuseHolder [mm] "3568 Mini Fuse Holder"
  round 1.7 hole 1.7: 1(-4.96,-1.7) 1(-4.96,1.7) 2(4.96,-1.7) 2(4.96,1.7)
  silkscreen extent -8.25,-3.56 8.13,3.56, body extent -8,-4.19 8,3.38, height 16.17
"CAP 0402/1005" [mm] "Chip Capacitor, 2-Leads, Body 1.02x0.51mm, IPC Medium Density"
  rect 0.6x0.64 smd: 1(-0.44,0) 2(0.44,0)
  silkscreen extent -1,-0.5 1,0.5, body extent -0.5,-0.26 0.5,0.26, height 0.52
"CAP 0603/1608" [mm] "Chip Capacitor, 2-Leads, Body 1.60x0.80mm, IPC Medium Density"
  rect 0.9x1 smd: 1(-0.675,0) 2(0.675,0)
  silkscreen extent -1.4,-0.7 1.4,0.7, body extent -0.8,-0.41 0.8,0.41, height 0.82
"CAP 0805/2012" [mm] "Chip Capacitor, 2-Leads, Body 2.00x1.20mm, IPC Medium Density"
  rect 1.3x1.4 smd: 1(-0.8,0) 2(0.8,0)
  silkscreen extent -1.7,-0.9 1.7,0.9, body extent -1,-0.64 1,0.64, height 1.26
HDR2X5_SMT [mm] "Header, 10-Leads, Body 3.43x6.35mm, Pitch 1.27mm"
  rect 0.76x2.4 smd: 1(-2.54,-1.95) 2(-2.54,1.95) 3(-1.27,-1.95) 4(-1.27,1.95) 5(0,-1.95) 6(0,1.95) 7(1.27,-1.95) 8(1.27,1.95) 9(2.54,-1.95) 10(2.54,1.95)
  round 0 hole 1 unplated: MH1(-1.905,0) MH2(1.905,0)
  silkscreen extent -2.67,-3.82 -2.42,-3.58, body extent -3.18,-1.72 3.18,1.72, height 4.55
HRP5 [mm]
  rect 1.07x1.37 smd: 1(-3.44,-6.125) 2(-1.72,-6.125) 3(0,-6.125) 4(1.72,-6.125) 5(3.44,-6.125)
  rect 10x9 all layers, no hole: 6(0,0)
  round 0.3 hole 0.3: hole(-4.2,-3.6) hole(-4.2,-2.4) hole(-4.2,-1.2) hole(-4.2,0) hole(-4.2,1.2) hole(-4.2,2.4) hole(-4.2,3.6) hole(-3,-3.6) hole(-3,-2.4) hole(-3,-1.2) hole(-3,0) hole(-3,1.2) hole(-3,2.4) hole(-3,3.6) hole(-1.8,-3.6) hole(-1.8,-2.4) hole(-1.8,-1.2) hole(-1.8,0) hole(-1.8,1.2) hole(-1.8,2.4) hole(-1.8,3.6) hole(-0.6,-3.6) hole(-0.6,-2.4) hole(-0.6,-1.2) hole(-0.6,0) hole(-0.6,1.2) hole(-0.6,2.4) hole(-0.6,3.6) hole(0.6,-3.6) hole(0.6,-2.4) hole(0.6,-1.2) hole(0.6,0) hole(0.6,1.2) hole(0.6,2.4) hole(0.6,3.6) hole(1.8,-3.6) hole(1.8,-2.4) hole(1.8,-1.2) hole(1.8,0) hole(1.8,1.2) hole(1.8,2.4) hole(1.8,3.6) hole(3,-3.6) hole(3,-2.4) hole(3,-1.2) hole(3,0) hole(3,1.2) hole(3,2.4) hole(3,3.6) hole(4.2,-3.6) hole(4.2,-2.4) hole(4.2,-1.2) hole(4.2,0) hole(4.2,1.2) hole(4.2,2.4) hole(4.2,3.6)
  body extent -4.75,-4.44 4.7,4.45, height 1.9
LFPAK-SO8 [mm] "TO, 5-Pads, Body 5.15x5.86mm (max), IPC Low Density"
  rect 1.15x0.7 smd: 1(-2.7,1.905) 2(-2.7,0.635) 3(-2.7,-0.635) 4(-2.7,-1.905)
  rect 4.6x4.7 smd: mb(1.3,0)
  silkscreen extent -2.77,2.66 -2.53,2.91, body extent -2.95,-2.5 3.05,2.5, height 1.25
"MSOP10 (RM-10)" [mm] "AD5314WARMZ-REEL7"
  oval 0.85x0.25 smd: 1(-2.225,1) 2(-2.225,0.5) 3(-2.225,0) 4(-2.225,-0.5) 5(-2.225,-1) 6(2.225,-1) 7(2.225,-0.5) 8(2.225,0) 9(2.225,0.5) 10(2.225,1)
  silkscreen extent -2.35,-1.55 1.15,1.8, body extent -1.55,-1.55 1.55,1.55, height 1.1
MSOP-8 [mm] "MSOP, 8-Leads, Body 3.00x3.00mmPitch 0.65mm, IPC MSOP65P490X110-8N, Medium Density, LTC2053, AD8495, LT6100HMS8PBF"
  rect 0.889x0.42 smd: 1(-2.105,0.975) 2(-2.105,0.325) 3(-2.105,-0.325) 4(-2.105,-0.975) 5(2.105,-0.975) 6(2.105,-0.325) 7(2.105,0.325) 8(2.105,0.975)
  silkscreen extent -2.23,-1.55 1.15,1.86, body extent -1.55,-1.55 1.55,1.55, height 1.1
"PTC Fuse 2920/07351" [mm] "Chip PTC Fuse, 2-Leads, Body 7.36x5.12mm, IPC Medium Density"
  rect 3.5x5.45 smd: 1(-2.625,0) 2(2.625,0)
  silkscreen extent -0.5,-2.62 0.5,2.63, body extent -3.99,-2.72 3.99,2.72, height 1.25
RCU-0C [mm]
  rect 1.15x2.05 all layers, no hole: 1(0,0)
"RES 0402/1005" [mm] "Chip Resistor, 2-Leads, Body 1.0x0.5mm, IPC Medium Density"
  rect 0.75x0.6 smd: 1(-0.575,0) 2(0.575,0)
  silkscreen extent -1.14,-0.51 1.14,0.51, body extent -0.5,-0.25 0.5,0.25, height 0.35
"RES 0603/1608" [mm] "Chip Resistor, 2-Leads, Body 1.60x0.80mm, IPC Medium Density"
  rect 0.85x0.95 smd: 1(-0.65,0) 2(0.65,0)
  silkscreen extent -1.27,-0.7 1.27,0.7, body extent -0.8,-0.4 0.8,0.4, height 0.45
"RES 0805/2012" [mm] "Chip Resistor, 2-Leads, Body 2.00x1.25mm, IPC Medium Density"
  rect 1.15x1.35 smd: 1(-0.875,0) 2(0.875,0)
  silkscreen extent -1.7,-0.9 1.7,0.9, body extent -0.95,-0.62 1.05,0.63, height 0.6
"RES 2010/5025" [mm] "Current Sense Resistor, 2-Leads, Body 5.05x2.55mm, IPC Medium Density"
  rect 2.25x2.6 smd: 1(-1.775,0) 2(1.775,0)
  silkscreen extent -0.25,-1.2 0.25,1.2, body extent -2.55,-1.3 2.55,1.3, height 0.65
SO-20 [mm] "LT1161ISWPBF"
  rect 1.9x0.6 smd: 1(-4.75,5.715) 2(-4.75,4.445) 3(-4.75,3.175) 4(-4.75,1.905) 5(-4.75,0.635) 6(-4.75,-0.635) 7(-4.75,-1.905) 8(-4.75,-3.175) 9(-4.75,-4.445) 10(-4.75,-5.715) 11(4.75,-5.715) 12(4.75,-4.445) 13(4.75,-3.175) 14(4.75,-1.905) 15(4.75,-0.635) 16(4.75,0.635) 17(4.75,1.905) 18(4.75,3.175) 19(4.75,4.445) 20(4.75,5.715)
  silkscreen extent -4.88,-6.5 3.4,6.69, body extent -3.8,-6.5 3.8,6.5, height 2.65
SOD123F [mm] "SODFL, 2-Leads, Body 1.80x3.50mm, IPC Low Density"
  rect 1.35x1.45 smd: 1(-1.475,0) 2(1.475,0)
  silkscreen extent -0.38,-0.76 1.75,1.5, body extent -1.75,-0.95 1.75,0.95, height 1.15
SOIC-8 [mm] "SOIC, 8-Leads, Body 4.90x3.90mm, Pitch 1.27mm, IPC Medium Density"
  oval 1.45x0.6 smd: 1(-2.725,1.905) 2(-2.725,0.635) 3(-2.725,-0.635) 4(-2.725,-1.905) 5(2.725,-1.905) 6(2.725,-0.635) 7(2.725,0.635) 8(2.725,1.905)
  silkscreen extent -2.85,-2.5 1.6,2.88, body extent -3,-2.5 3,2.5, height 1.75
SOIC-16-NB [mm] "MMPQ3904, DG409DY-E3"
  oval 1.45x0.6 smd: 1(-2.725,4.445) 2(-2.725,3.175) 3(-2.725,1.905) 4(-2.725,0.635) 5(-2.725,-0.635) 6(-2.725,-1.905) 7(-2.725,-3.175) 8(-2.725,-4.445) 9(2.725,-4.445) 10(2.725,-3.175) 11(2.725,-1.905) 12(2.725,-0.635) 13(2.725,0.635) 14(2.725,1.905) 15(2.725,3.175) 16(2.725,4.445)
  silkscreen extent -2.85,-5 1.6,5.42, body extent -2,-5 2,5, height 1.75
SOT23-3 [mm] "SOT23, 3-Leads, Body 2.92x2.37mm, Pitch 0.95mm, IPC Medium Density, NUP2105L"
  rect 0.9x0.8 smd: 1(-1,0.95) 2(-1,-0.95) 3(1,0)
  silkscreen extent -1.12,-1.5 0.7,2.02, body extent -0.7,-1.52 0.7,1.52, height 1.11
SOT23-5 [mm] "SOT23, 5-Leads, Body 2.90x2.80mm, Pitch 0.95mm, IPC Medium Density, LP5907-3.3"
  rect 1x0.6 smd: 1(-1.375,0.95) 2(-1.375,0) 3(-1.375,-0.95) 4(1.375,-0.95) 5(1.375,0.95)
  silkscreen extent -1.5,-1.55 0.5,1.92, body extent -0.88,-1.52 0.87,1.53, height 1.45
"SOT-23 (TO-236)" [mm]
  rect 0.9x0.8 smd: 1(-1,0.95) 2(-1,-0.95) 3(1,0)
  silkscreen extent -1.13,-1.46 0.65,2.02, body extent -0.65,-1.46 0.65,1.46, height 1.11
SSOP-28 [mm] "SOP68P780X200-28N ,SOP, 28-Leads, Body 10.20x5.30mm, Pitch 0.68mm, IPC Medium Density, FT232RL"
  oval 1.65x0.5 smd: 1(-3.625,4.394) 2(-3.625,3.718) 3(-3.625,3.042) 4(-3.625,2.366) 5(-3.625,1.69) 6(-3.625,1.014) 7(-3.625,0.338) 8(-3.625,-0.338) 9(-3.625,-1.014) 10(-3.625,-1.69) 11(-3.625,-2.366) 12(-3.625,-3.042) 13(-3.625,-3.718) 14(-3.625,-4.394) 15(3.625,-4.394) 16(3.625,-3.718) 17(3.625,-3.042) 18(3.625,-2.366) 19(3.625,-1.69) 20(3.625,-1.014) 21(3.625,-0.338) 22(3.625,0.338) 23(3.625,1.014) 24(3.625,1.69) 25(3.625,2.366) 26(3.625,3.042) 27(3.625,3.718) 28(3.625,4.394)
  silkscreen extent -3.75,-5.25 2.4,5.32, body extent -2.8,-5.25 2.8,5.25, height 2
"SUPERSEAL 60POS 90Deg" [mm]
  round 2.2 hole 1.3: A1(7.25,14.5) A2(10.25,14.5) A3(13.25,14.5) A4(16.25,14.5) A5(19.25,14.5) A6(22.25,14.5) A7(25.25,14.5) A8(28.25,14.5) A9(31.25,14.5) A10(8.75,12) A11(11.75,12) A12(14.75,12) A13(17.75,12) A14(20.75,12) A15(23.75,12) A16(26.75,12) A17(29.75,12) A18(8.75,9) A19(11.75,9) A20(14.75,9) A21(17.75,9) A22(20.75,9) A23(23.75,9) A24(26.75,9) A25(29.75,9) A26(7.25,6.5) A27(10.25,6.5) A28(13.25,6.5) A29(16.25,6.5) A30(19.25,6.5) A31(22.25,6.5) A32(25.25,6.5) A33(28.25,6.5) A34(31.25,6.5) B1(45.75,14.5) B2(48.75,14.5) B3(51.75,14.5) B4(54.75,14.5) B5(57.75,14.5) B6(60.75,14.5) B7(63.75,14.5) B8(47.25,12) B9(50.25,12) B10(53.25,12) B11(56.25,12) B12(59.25,12) B13(62.25,12) B14(47.25,9) B15(50.25,9) B16(53.25,9) B17(56.25,9) B18(59.25,9) B19(62.25,9) B20(45.75,6.5) B21(48.75,6.5) B22(51.75,6.5) B23(54.75,6.5) B24(57.75,6.5) B25(60.75,6.5) B26(63.75,6.5)
  round 3.3 hole 3.3: CH(38.5,0) LH(0,0) RH(71,0)
  silkscreen extent -3.5,-3.5 74.5,17, body extent -3.5,-19.5 74.5,17, height 28.15
TECO-1981568-5_V [mm] "SMD, 5-Leads, Body 8x5.9mm, Pitch 0.65mm"
  rect 0.4x1.35 smd: 1(-1.3,0) 2(-0.65,0) 3(0,0) 4(0.65,0) 5(1.3,0)
  rect 1.6x1.4 smd: 6(-3.2,-0.225) 7(3.2,-0.225)
  rect 1.45x1.3 smd: 8(-3.425,-2.675) 9(3.425,-2.675)
  rect 1.9x1.9 smd: 10(-1.2,-2.675) 11(1.2,-2.675)
  silkscreen extent -4,-5.63 4,1.12, body extent -4,-5.63 4,0.28, height 3
TO-277 [mm] "DFN, 3-Leads, Body 4.44x5.91mm, Pitch 3.68mm, IPC Medium Density, FSV20100V"
  rect 1.3x1.45 smd: 1(-2.794,1.016) 2(-2.794,-1.016)
  rect 4.9x4.15 smd: 3(0.913,0)
  silkscreen extent -3.13,2.67 -3.03,2.76, body extent -3.3,-2.31 3.56,2.32, height 1.2
TQFP64 [mm] "TSQFP, 64-Leads, Body 10.00x10.00mm, Pitch 0.50mm, IPC Medium Density, MKE18F512VLH16"
  rect 1.35x0.3 smd: 1(-5.75,3.75) 2(-5.75,3.25) 3(-5.75,2.75) 4(-5.75,2.25) 5(-5.75,1.75) 6(-5.75,1.25) 7(-5.75,0.75) 8(-5.75,0.25) 9(-5.75,-0.25) 10(-5.75,-0.75) 11(-5.75,-1.25) 12(-5.75,-1.75) 13(-5.75,-2.25) 14(-5.75,-2.75) 15(-5.75,-3.25) 16(-5.75,-3.75) 33(5.75,-3.75) 34(5.75,-3.25) 35(5.75,-2.75) 36(5.75,-2.25) 37(5.75,-1.75) 38(5.75,-1.25) 39(5.75,-0.75) 40(5.75,-0.25) 41(5.75,0.25) 42(5.75,0.75) 43(5.75,1.25) 44(5.75,1.75) 45(5.75,2.25) 46(5.75,2.75) 47(5.75,3.25) 48(5.75,3.75)
  rect 0.3x1.35 smd: 17(-3.75,-5.75) 18(-3.25,-5.75) 19(-2.75,-5.75) 20(-2.25,-5.75) 21(-1.75,-5.75) 22(-1.25,-5.75) 23(-0.75,-5.75) 24(-0.25,-5.75) 25(0.25,-5.75) 26(0.75,-5.75) 27(1.25,-5.75) 28(1.75,-5.75) 29(2.25,-5.75) 30(2.75,-5.75) 31(3.25,-5.75) 32(3.75,-5.75) 49(3.75,5.75) 50(3.25,5.75) 51(2.75,5.75) 52(2.25,5.75) 53(1.75,5.75) 54(1.25,5.75) 55(0.75,5.75) 56(0.25,5.75) 57(-0.25,5.75) 58(-0.75,5.75) 59(-1.25,5.75) 60(-1.75,5.75) 61(-2.25,5.75) 62(-2.75,5.75) 63(-3.25,5.75) 64(-3.75,5.75)
  silkscreen extent -5.87,-4.67 4.67,4.68, body extent -5,-5 5,5, height 1.6
XG8T-0231 [mm] "3 pin header"
  round 1.4 hole 0.8: 1(0,0) 2(2.54,0)